# EAGLE board stmotor (EAGLE 7.2.0)
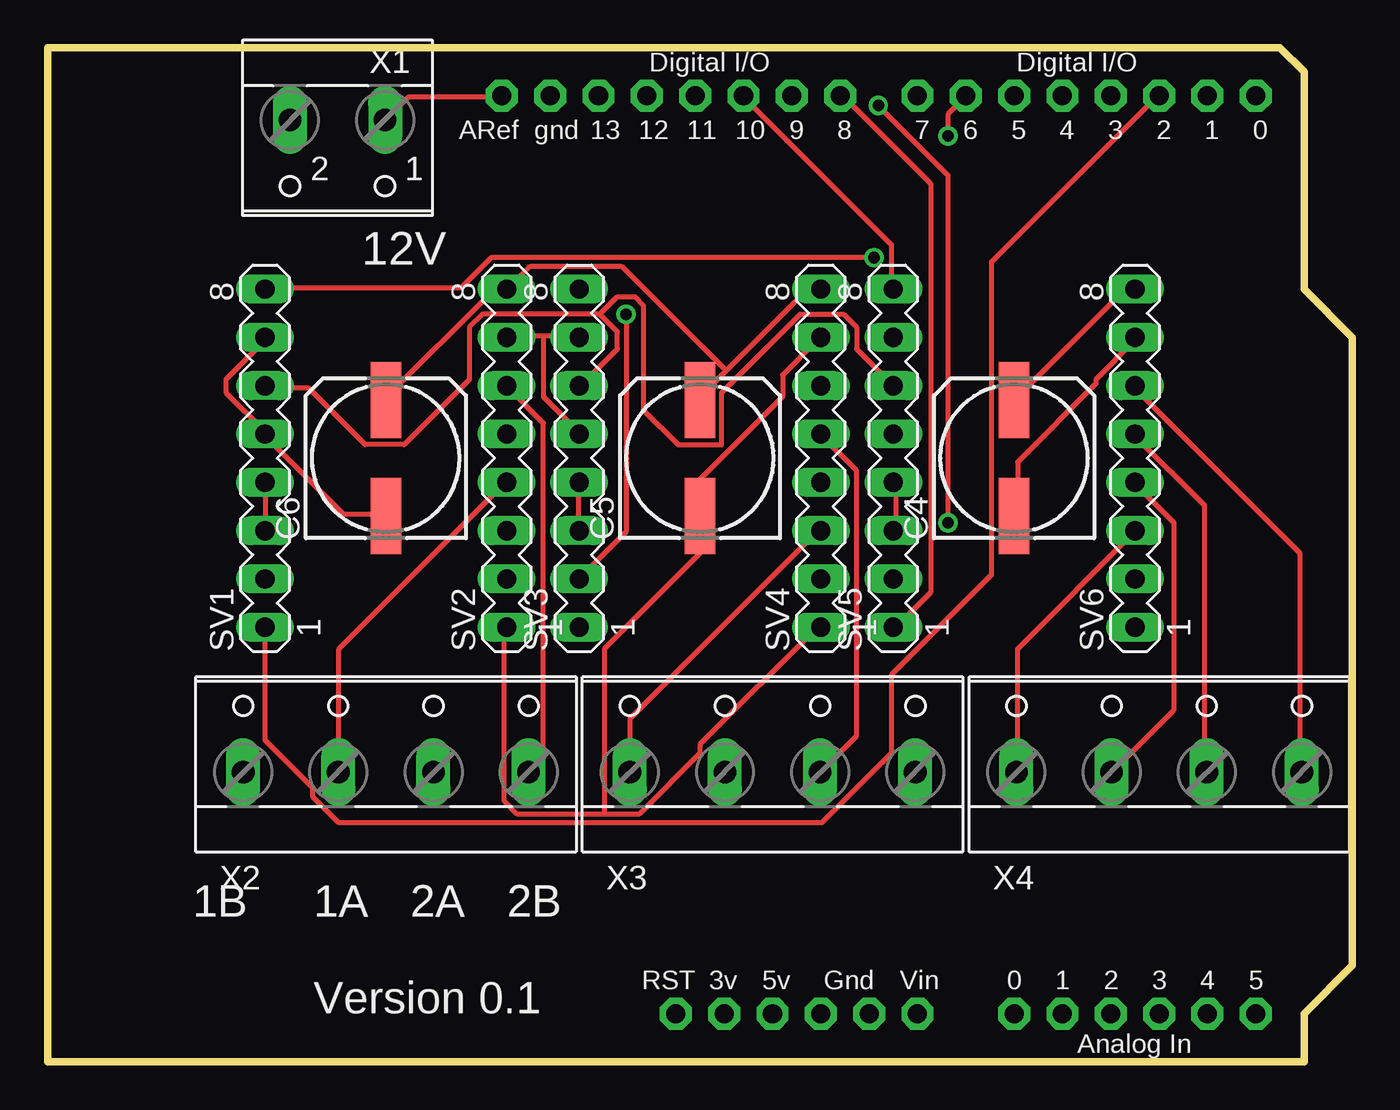
[diagram p0: board, top side]
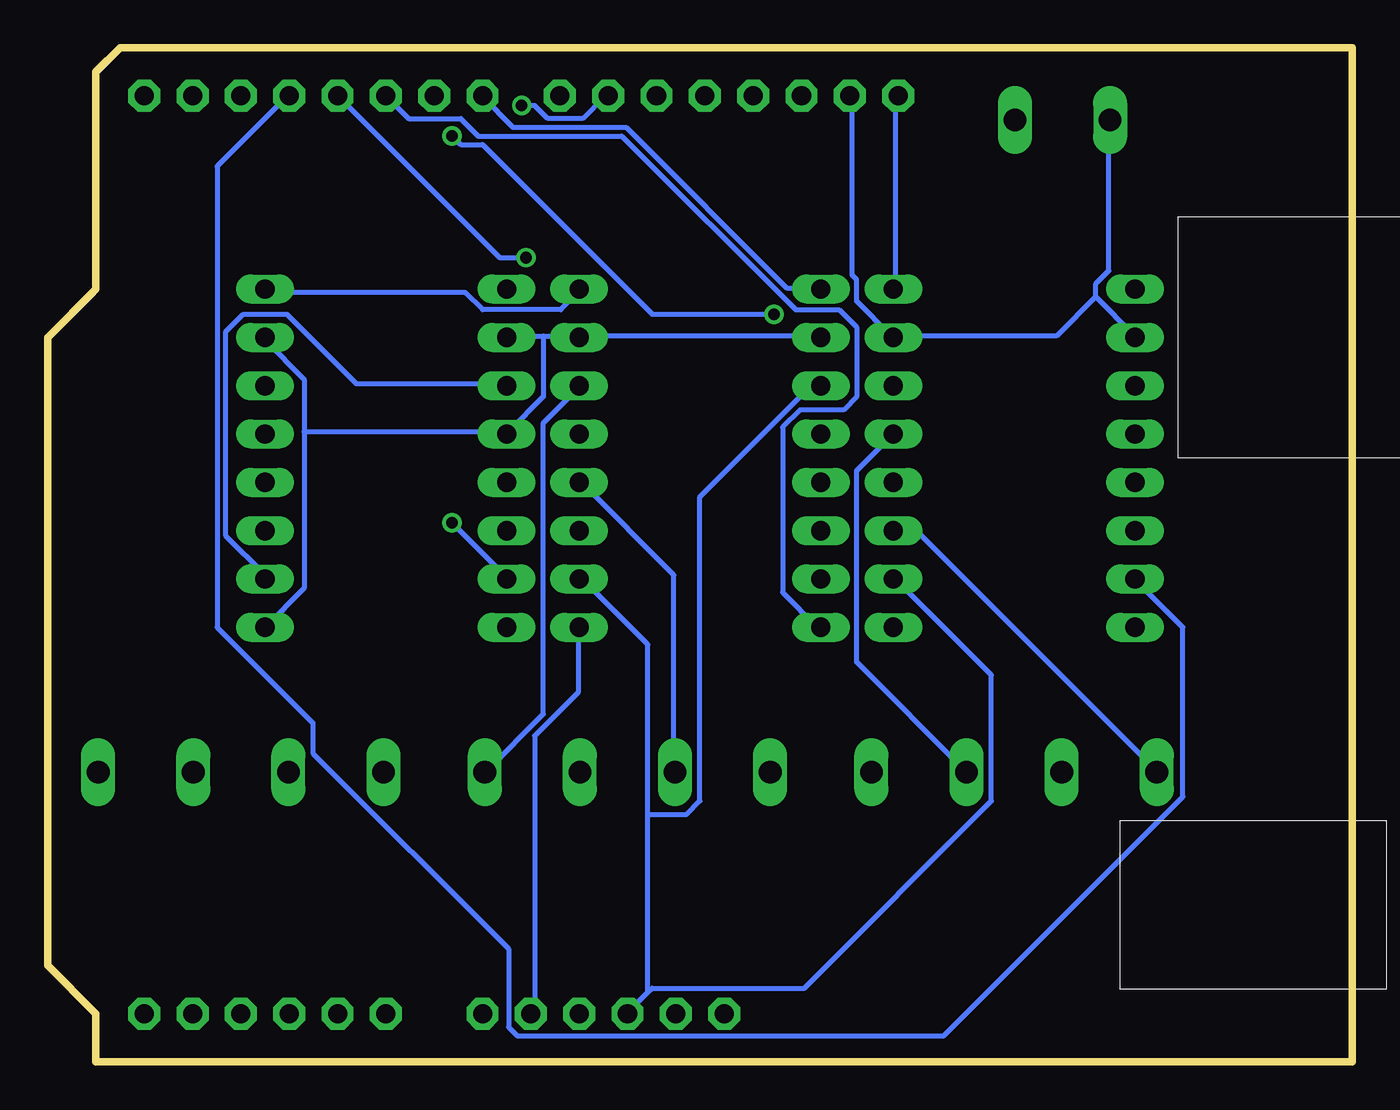
[diagram p1: board, bottom side, seen from below]

Size 68.58 x 53.34 mm. Coordinates in mm from the lower left corner, seen from the top.
Outline: 0,0 66.04,0 66.04,2.54 68.58,5.08 68.58,38.1 66.04,40.64 66.04,52.07 64.77,53.34 0,53.34 0,0
Copper layers (1*16): Top 0.035mm / dielectric 1.5mm / Bottom 0.035mm
Design rules "default": minimum track width 10mil, minimum drill 24mil, track to track 8mil, track to pad 8mil, pad to pad 8mil, via to via 8mil, smd to smd 8mil, copper to edge 40mil, drill to drill 8mil, minimum pad ring 10mil, minimum via ring 8mil, stop-mask expansion 4mil, vias tented up to drill 0mil, thermal gap 10mil

## Footprints (pad centres in the part's own frame; a part is rotated, then mirrored left to right if it is on the bottom)
153CLV-0807 = smd 4 x 1.6: + 3.05,0; - -3.05,0
MA08-1 = drill 1.016 long: 1 -8.89,0; 2 -6.35,0; 3 -3.81,0; 4 -1.27,0; 5 1.27,0; 6 3.81,0; 7 6.35,0; 8 8.89,0
ARDUINO-NOHOLE = drill 1 pad 1.676 octagon: 3V 35.56,2.54; 5V 38.1,2.54; A0 50.8,2.54; A1 53.34,2.54; A2 55.88,2.54; A3 58.42,2.54; A4 60.96,2.54; A5 63.5,2.54; AREF 23.876,50.8; D0 63.5,50.8; D1 60.96,50.8; D2 58.42,50.8; D3 55.88,50.8; D4 53.34,50.8; D5 50.8,50.8; D6 48.26,50.8; D7 45.72,50.8; D8 41.656,50.8; D9 39.116,50.8; D10 36.576,50.8; D11 34.036,50.8; D12 31.496,50.8; D13 28.956,50.8; GND 26.416,50.8; GND1 43.18,2.54; GND2 40.64,2.54; RESET 33.02,2.54; VIN 45.72,2.54
W237-102 = drill 1.194 long: 1 -2.5,-1.27; 2 2.5,-1.27
W237-4 = drill 1.194 long: 1 -7.5,-1.27; 2 -2.5,-1.27; 3 2.5,-1.27; 4 7.5,-1.27

## Placement (x,y rotation side)
C4  [153CLV-0807]  50.8,31.75 90 top
C5  [153CLV-0807]  34.29,31.75 90 top
C6  [153CLV-0807]  17.78,31.75 90 top
SV1  [MA08-1]  11.43,31.75 90 top
SV2  [MA08-1]  24.13,31.75 90 top
SV3  [MA08-1]  27.94,31.75 90 top
SV4  [MA08-1]  40.64,31.75 90 top
SV5  [MA08-1]  44.45,31.75 90 top
SV6  [MA08-1]  57.15,31.75 90 top
U$1  ARDUINO-NOHOLE  [ARDUINO-NOHOLE]  0,0 0 top
X1  [W237-102]  15.24,48.26 180 top
X2  [W237-4]  17.78,16.51 0 top
X3  [W237-4]  38.1,16.51 0 top
X4  [W237-4]  58.42,16.51 0 top

## Library data of the parts
C4-C6 = rcl
SV1-SV6 = con-lstb; OC_FARNELL: unknown; OC_NEWARK: unknown
U$1 = adafruit
X1 = con-wago-500; MPN: 237-102; OC_FARNELL: unknown; OC_NEWARK: 70K9898
X2-X4 = con-wago-500; OC_FARNELL: unknown; OC_NEWARK: unknown

## Nets
3V: U$1.3V
+5V: SV1.6 SV2.2 SV3.6 SV4.2 SV5.6 SV6.2 U$1.5V
+12V: C4.+ C5.+ C6.+ SV2.8 SV4.8 SV6.8 U$1.AREF X1.1
GND: C4.- C5.- C6.- SV1.5 SV1.7 SV2.1 SV2.7 SV3.5 SV3.7 SV4.1 SV4.7 SV5.5 SV5.7 SV6.1 SV6.7 U$1.GND U$1.GND1 X1.2
GND2: U$1.GND2
N$1: SV3.3 SV3.4
N$2: SV5.3 SV5.4
S1_1A: SV2.4 X2.2
S1_1B: SV2.3 X2.1
S1_2A: SV2.5 X2.3
S1_2B: SV2.6 X2.4
S1_DIR: SV1.1 U$1.D2
S1_EN: SV1.8 U$1.D4
S1_RST: SV1.3 SV1.4
S1_STEP: SV1.2 U$1.D3
S2_1A: SV4.4 X3.2
S2_1B: SV4.3 X3.1
S2_2A: SV4.5 X3.3
S2_2B: SV4.6 X3.4
S2_DIR: SV3.1 U$1.D5
S2_EN: SV3.8 U$1.D7
S2_STEP: SV3.2 U$1.D6
S3_1A: SV6.4 X4.2
S3_1B: SV6.3 X4.1
S3_2A: SV6.5 X4.3
S3_2B: SV6.6 X4.4
S3_DIR: SV5.1 U$1.D8
S3_EN: SV5.8 U$1.D10
S3_STEP: SV5.2 U$1.D9
VIN: U$1.VIN

## Tracks (layer width: path | path; a pad name or v marks a point on that pad's centre or on a via)
+5V
  Top 0.254: 29.03,39.32 22.86,39.32 22.17,38.63 22.17,35.89 18.75,32.46 16.69,32.46 13.72,35.43 11.43,35.43 SV1.6 | 29.03,39.32 29.95,38.41 29.95,37.49 28.12,35.66 SV3.6 | SV5.6 42.52,37.49 42.52,38.63 41.83,39.32 39.55,39.32 35.43,35.2 35.43,32.46 33.15,32.46 31.32,34.29 31.32,39.78 30.86,40.23 29.95,40.23 29.03,39.32
  Bottom 0.254: SV5.6 44.58,35.66 52.35,35.66 56.01,39.32 58.29,39.32 59.21,38.41 59.21,27.66 57.15,25.6 SV6.2 | 37.03,3.66 37.95,2.74 U$1.5V | 37.03,3.66 36.8,3.89 28.8,3.89 18.97,13.72 18.97,20.34 24,25.38 SV2.2 | 37.03,3.66 37.03,13.03 | 37.03,13.03 37.03,21.95 40.46,25.38 SV4.2 | 37.03,13.03 34.98,13.03 34.29,13.72 34.29,29.72 28.57,35.43 28.12,35.43 SV3.6
+12V
  Top 0.254: SV6.8 57.15,40.46 56.46,40.46 50.98,34.98 C4.+ | 35.66,36.35 34.29,34.98 C5.+ | 35.66,36.35 39.78,40.46 40.46,40.46 SV4.8 | U$1.AREF 23.77,50.75 18.97,50.75 17.83,49.61 X1.1 | C6.+ 17.83,34.98 23.32,40.46 24,40.46 SV2.8 24.23,40.69 25.38,41.83 30.18,41.83 35.66,36.35
  Bottom 0.254: U$1.AREF 24,50.75 24,40.69 SV2.8 | SV6.8 57.15,40.46 46.63,40.46 45.72,39.55 41.6,39.55 40.69,40.46 SV4.8
GND
  Top 0.254: 29.26,13.03 31.09,13.03 34.29,16.23 34.29,16.69 40.46,22.86 SV4.1 | 29.26,13.03 24.69,13.03 24,13.72 24,22.86 SV2.1 | SV4.7 40.46,37.95 38.63,36.12 38.63,34.98 34.29,30.63 C5.- 34.29,26.75 29.26,21.72 29.26,13.03 | C4.- 50.98,28.8 50.98,31.55 55.09,35.66 55.09,35.89 57.15,37.95 SV6.7 | 26.06,38.18 27.89,38.18 SV3.7 | 26.06,38.18 24.23,38.18 SV2.7 | 26.06,38.18 26.06,34.98 27.89,33.15 SV3.5 | SV1.7 11.43,37.95 9.37,35.89 9.37,35.2 11.43,33.15 SV1.5 11.43,32.92 15.54,28.8 17.6,28.8 C6.-
  Bottom 0.254: U$1.GND1 42.98,2.74 42.98,17.14 40.69,19.43 40.69,22.86 SV4.1 | 42.52,38.18 44.35,38.18 SV5.7 | 42.52,38.18 40.69,38.18 SV4.7 40.46,38.18 28.12,38.18 SV3.7 | 42.52,38.18 42.52,34.98 44.35,33.15 SV5.5 44.58,33.15 55.09,33.15 | SV6.1 55.09,24.92 55.09,33.15 | 55.09,33.15 55.09,35.89 57.15,37.95 SV6.7 | U$1.GND 26.29,50.75 26.29,41.38 26.06,41.15 26.06,40.01 24.23,38.18 SV2.7 24,38.18 15.54,38.18 13.49,40.23 | 13.49,40.23 13.49,40.92 12.8,41.6 12.8,49.38 X1.2 | 13.49,40.23 11.43,38.18 SV1.7
N$1
  Top 0.254: SV3.3 27.89,28.12 27.89,30.4 SV3.4
N$2
  Top 0.254: SV5.3 44.58,28.12 44.58,30.4 SV5.4
S1_1A
  Top 0.254: SV2.4 24,30.4 15.32,21.72 15.32,15.32 X2.2
S1_1B
  Bottom 0.254: SV2.3 24,27.89 22.86,27.89 10.29,15.32 X2.1
S1_2A
  Bottom 0.254: SV2.5 26.06,31.09 26.06,21.03 20.34,15.32 X2.3
S1_2B
  Top 0.254: SV2.6 24.23,35.43 26.06,33.6 26.06,16 25.38,15.32 X2.4
S1_DIR
  Top 0.254: SV1.1 11.43,16.92 13.95,14.4 13.95,13.95 15.32,12.57 40.69,12.57 44.35,16.23 44.35,20.34 49.61,25.6 49.61,42.06 58.29,50.75 U$1.D2
S1_EN  (via drill 0.61)
  Top 0.254: v43.43,42.29 23.32,42.29 21.72,40.69 11.43,40.69 SV1.8
  Bottom 0.254: v43.43,42.29 44.81,42.29 53.26,50.75 U$1.D4
S1_RST
  Top 0.254: SV1.4 SV1.3
S1_STEP
  Bottom 0.254: SV1.2 11.43,25.38 8.91,22.86 8.91,13.95 21.49,1.37 43.89,1.37 44.35,1.83 44.35,5.94 54.63,16.23 54.63,17.83 59.66,22.86 59.66,47.09 56.01,50.75 U$1.D3
S2_1A
  Bottom 0.254: SV4.4 40.46,30.4 35.66,25.6 35.66,15.32 X3.2
S2_1B
  Top 0.254: SV4.3 40.46,27.89 30.63,18.06 30.63,15.32 X3.1
S2_2A
  Top 0.254: SV4.5 40.69,32.92 42.52,31.09 42.52,17.14 40.69,15.32 X3.3
S2_2B
  Bottom 0.254: SV4.6 40.69,35.43 42.52,33.6 42.52,18.29 45.49,15.32 X3.4
S2_DIR
  Bottom 0.254: U$1.D5 49.61,49.61 46.86,49.61 45.95,48.69 38.41,48.69 29.26,39.55 26.98,39.55 26.06,38.63 26.06,34.98 26.75,34.29 29.03,34.29 29.95,33.38 29.95,24.69 28.12,22.86 SV3.1
S2_EN
  Bottom 0.254: SV3.8 28.12,40.69 29.72,40.69 38.18,49.15 44.12,49.15 45.72,50.75 U$1.D7
S2_STEP  (via drill 0.61)
  Top 0.254: v30.4,39.32 30.4,27.89 28.12,25.6 SV3.2 | v47.32,48.69 47.32,49.84 48.23,50.75 U$1.D6
  Bottom 0.254: v30.4,39.32 36.8,39.32 45.72,48.23 46.86,48.23 v47.32,48.69
S3_1A
  Top 0.254: SV6.4 57.15,30.4 59.21,28.35 59.21,18.52 56.01,15.32 X4.2
S3_1B
  Top 0.254: SV6.3 57.15,27.89 50.98,21.72 50.98,15.32 X4.1
S3_2A
  Top 0.254: SV6.5 57.15,32.92 60.81,29.26 60.81,15.32 X4.3
S3_2B
  Top 0.254: SV6.6 57.15,35.43 65.84,26.75 65.84,15.32 X4.4
S3_DIR
  Top 0.254: SV5.1 44.58,22.86 46.41,24.69 46.41,46.18 41.83,50.75 U$1.D8
S3_EN
  Top 0.254: SV5.8 44.35,40.69 44.35,42.98 36.58,50.75 U$1.D10
S3_STEP  (via drill 0.61)
  Top 0.254: v47.32,28.35 47.32,46.63 v43.66,50.29
  Bottom 0.254: v47.32,28.35 44.58,25.6 SV5.2 | v43.66,50.29 42.98,50.29 42.29,49.61 40.46,49.61 39.32,50.75 U$1.D9

## Text on the board
tPlace: 12V | 1B | 1A | 2A | 2B | Version 0.1